# EAGLE board CanSplitter (EAGLE 9.6.2)
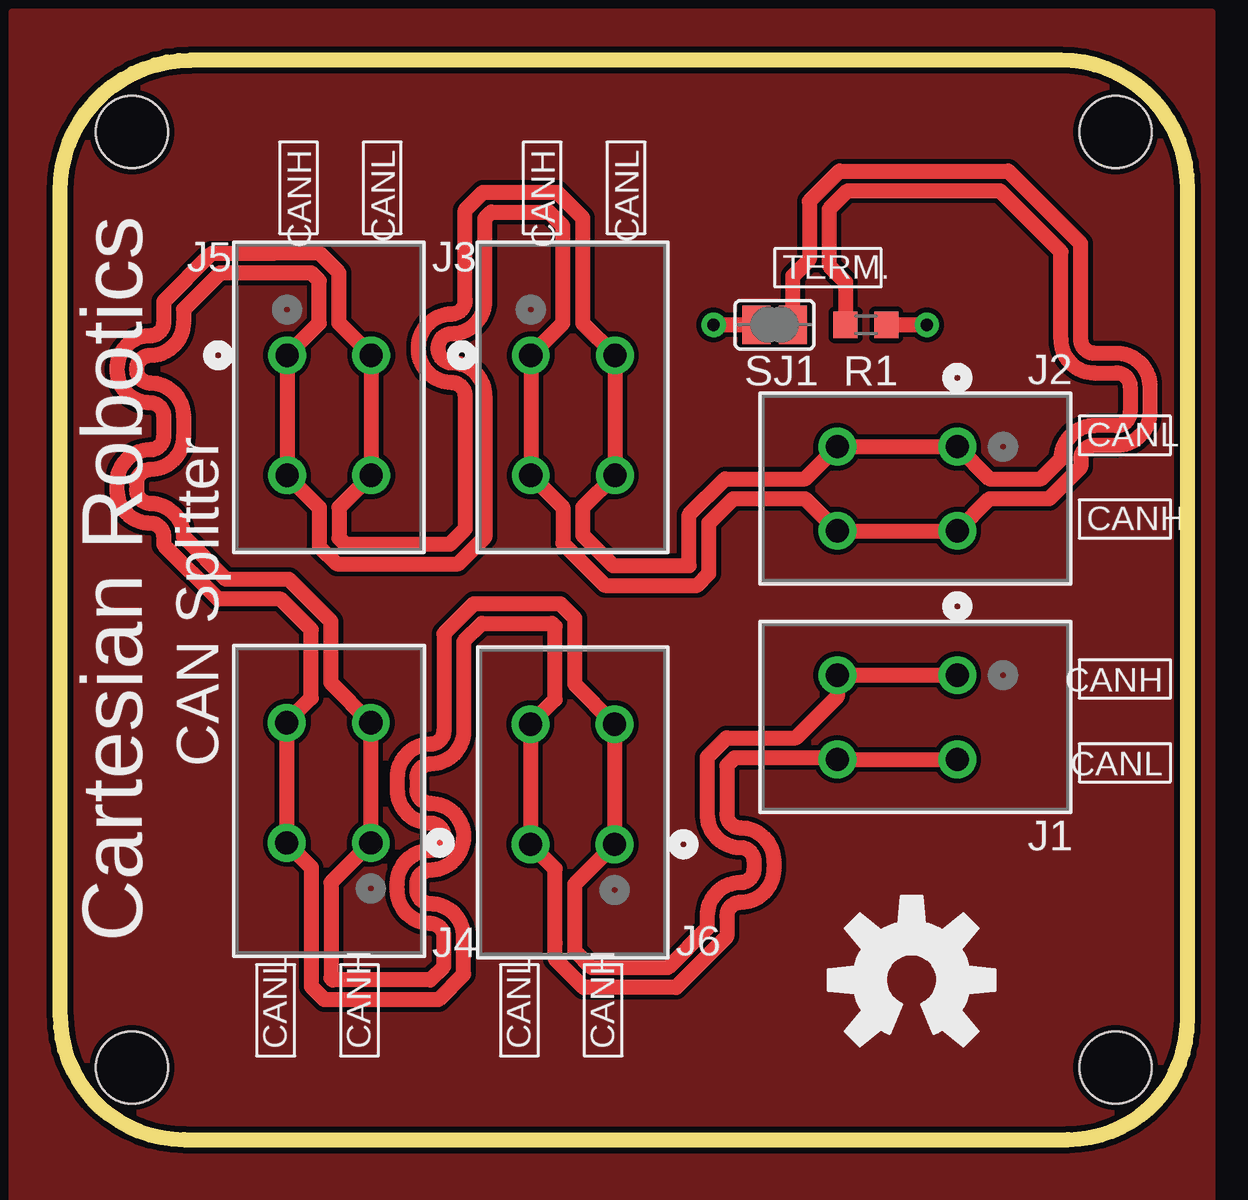
[diagram p0: board, top side]
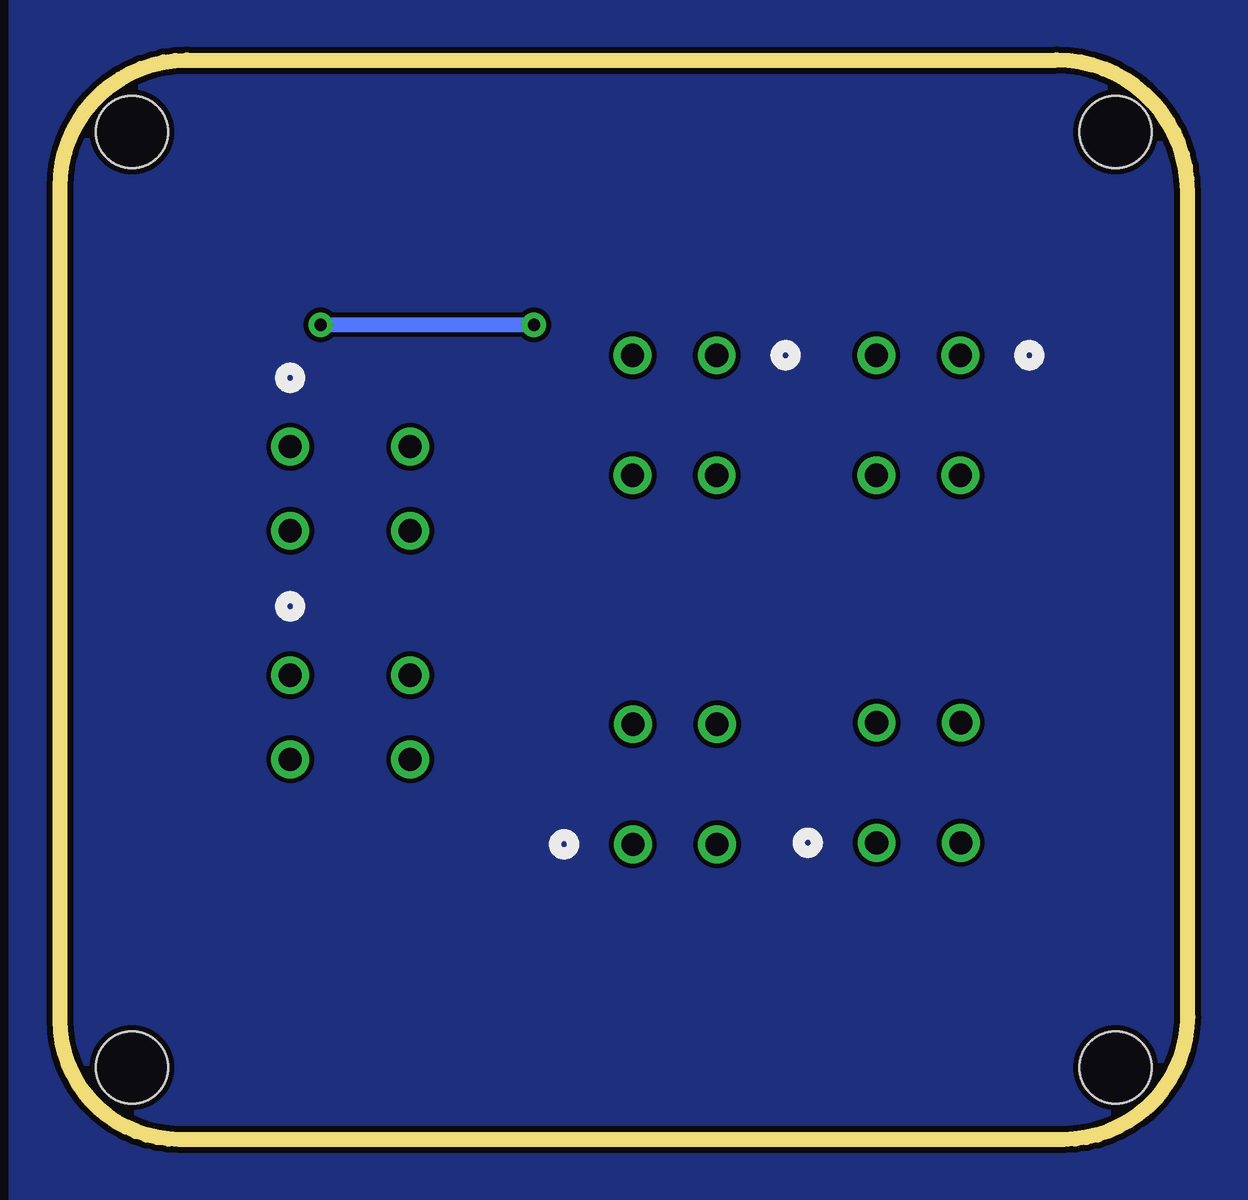
[diagram p1: board, bottom side, seen from below]

Size 47 x 45 mm. Coordinates in mm from the lower left corner, seen from the top.
Outline: 0,5.17 0,39.54 arc-90 5.46,45 41.7,45 arc-90 47,39.7 47,4.97 arc-90 42.03,0 5.17,0 arc-90 0,5.17
Copper layers (1*16): Top 0.035mm / dielectric 1.5mm / Bottom 0.035mm
Design rules "default": minimum track width 8mil, minimum drill 20mil, track to track 8mil, track to pad 8mil, pad to pad 8mil, via to via 8mil, smd to smd 8mil, copper to edge 10mil, drill to drill 8mil, minimum pad ring 12mil, minimum via ring 10mil, stop-mask expansion 4mil, vias tented up to drill 25mil, thermal gap 10mil
Holes 3 mm at 3,42 3,3 44,3 44,42

## Footprints (pad centres in the part's own frame; a part is rotated, then mirrored left to right if it is on the bottom)
CONN4_1885650000_WED = drill 0.965 pad 1.524: 1 0,0; 2 0,-5.004; 3 3.505,0; 4 3.505,-5.004
R0603 = smd 1 x 1.1: 1 -0.85,0; 2 0.85,0
SJ = smd 1.168 x 1.6: 1 -0.762,0; 2 0.762,0

## Placement (x,y rotation side)
J1  1885650000  [CONN4_1885650000_WED]  37.41,19.35 270 top
J2  1885650000  [CONN4_1885650000_WED]  37.41,28.88 270 top
J3  1885650000  [CONN4_1885650000_WED]  19.62,32.69 0 top
J4  1885650000  [CONN4_1885650000_WED]  12.96,12.37 180 top
J5  1885650000  [CONN4_1885650000_WED]  9.47,32.69 0 top
J6  1885650000  [CONN4_1885650000_WED]  23.12,12.31 180 top
LOGO1  OSHW-LOGOL  [OSHW-LOGO-L]  35.5,6.66 0 top
R1  120R  [R0603]  33.59,33.96 0 top
SJ1  [SJ]  29.78,33.96 0 top

## Library data of the parts
J1-J6 = weidmüllerLSF; COPYRIGHT: Copyright (C) 2025 Ultra Librarian. All rights reserved.; MANUFACTURER_PART_NUMBER: 1885650000; MFR_NAME: Weidmuller
LOGO1 = SparkFun-Aesthetics
R1 = rcl; SPICEPREFIX: R
SJ1 = jumper

## Nets
CAN_N: J1.3 J1.4 J2.1 J2.2 J3.3 J3.4 J4.3 J4.4 J5.3 J5.4 J6.3 J6.4 R1.1
CAN_P: J1.1 J1.2 J2.3 J2.4 J3.1 J3.2 J4.1 J4.2 J5.1 J5.2 J6.1 J6.2 SJ1.2
N$1: R1.2 SJ1.1

## Tracks (layer width: path | path; a pad name or v marks a point on that pad's centre or on a via)
CAN_N
  Top 0.62: 20.64,8.19 | 20.64,8.19 20.64,7.53 21.82,6.34 25.68,6.34 27.8,8.46 27.8,9.32 arc-90 28.36,9.89 arc90 29.75,11.27 29.75,11.61 arc90 28.36,12.99 arc-90 27.8,13.56 27.8,15.59 28.13,15.92 32.33,15.92 J1.4 J1.3 | 20.64,8.19 20.64,11.28 J6.3 J6.4 20.64,18.33 20.64,21.39 20.51,21.51 17.59,21.51 16.83,20.75 16.83,17.04 arc-90 15.44,15.66 arc90 14.88,15.09 14.88,14.58 arc90 15.44,14.01 arc-90 16.83,12.62 arc-90 15.44,11.24 arc90 14.88,10.67 14.88,10.39 arc90 15.44,9.83 arc-90 16.83,8.44 16.83,6.89 15.77,5.83 11.03,5.83 10.48,6.38 10.48,11.35 J4.3 J4.4 10.48,18.4 10.48,21.26 9.21,22.53 6.58,22.53 4.32,24.79 4.32,25.13 arc90 3.76,25.7 arc-90 2.37,27.08 2.37,27.36 arc-90 3.76,28.75 arc90 4.32,29.31 4.32,30.15 arc90 3.76,30.71 arc-90 2.37,32.1 2.37,32.12 arc-90 3.76,33.5 arc90 4.32,34.07 4.32,34.94 6.33,36.94 8.93,36.94 | 8.93,36.94 | 8.93,36.94 10.82,36.94 11.63,36.13 11.63,34.03 J5.3 J5.4 11.63,26.34 11.63,25.07 11.88,24.82 16.26,24.82 16.9,25.45 16.9,30.99 arc90 16.33,31.55 arc-90 14.94,32.94 14.94,33.02 arc-90 16.33,34.41 arc90 16.9,34.98 16.9,38.75 17.63,39.48 20.73,39.48 21.79,38.42 21.79,34.03 J3.3 J3.4 21.79,26.34 21.79,25.19 23.05,23.93 26.23,23.93 26.23,26.05 27.72,27.54 31.06,27.54 J2.2 J2.1 38.75,27.54 40.89,27.54 41.72,28.37 arc-90 43.11,29.76 44.04,29.76 arc90 44.61,30.32 44.61,31.39 arc90 44.04,31.96 43.11,31.96 arc-90 41.72,33.34 41.72,37.01 39.18,39.55 32.83,39.55 32.06,38.77 32.06,36.44 32.74,35.75 R1.1
CAN_P
  Top 0.62: 21.46,10.47 21.46,10.65 J6.1 J6.2 21.46,18.97 21.46,21.73 20.85,22.34 17.25,22.34 16.01,21.09 16.01,17.04 arc-90 15.44,16.48 arc90 14.06,15.09 14.06,14.58 arc90 15.44,13.19 arc-90 16.01,12.62 arc-90 15.44,12.06 arc90 14.06,10.67 14.06,10.39 arc90 15.44,9.01 arc-90 16.01,8.44 16.01,7.23 15.43,6.66 11.37,6.66 11.3,6.73 11.3,10.71 J4.1 J4.2 11.3,19.03 11.3,21.6 9.55,23.35 6.92,23.35 5.15,25.13 arc90 3.76,26.52 arc-90 3.2,27.08 3.2,27.36 arc-90 3.76,27.93 arc90 5.15,29.31 5.15,30.15 arc90 3.76,31.54 arc-90 3.2,32.1 3.2,32.12 arc-90 3.76,32.68 arc90 5.15,34.07 5.15,34.59 6.67,36.12 7.43,36.12 | 21.46,10.47 | 21.46,10.47 21.46,7.87 22.16,7.16 25.34,7.16 26.98,8.8 26.98,9.32 arc-90 28.36,10.71 arc90 28.93,11.27 28.93,11.61 arc90 28.36,12.17 arc-90 26.98,13.56 26.98,15.93 27.79,16.74 30.68,16.74 32.4,18.47 J1.2 J1.1 | 7.43,36.12 | SJ1.2 30.55,36 31.23,36.69 31.23,39.11 32.49,40.37 39.52,40.37 42.55,37.35 42.55,33.34 arc90 43.11,32.78 44.04,32.78 arc-90 45.43,31.39 45.43,30.32 arc-90 44.04,28.94 43.11,28.94 arc90 42.55,28.37 42.55,28.03 41.23,26.72 38.75,26.72 J2.3 J2.4 31.06,26.72 28.06,26.72 27.05,25.7 27.05,23.59 26.57,23.1 22.71,23.1 20.97,24.85 20.97,26.34 J3.2 J3.1 20.97,34.03 20.97,38.08 20.39,38.66 17.97,38.66 17.72,38.41 17.72,34.98 arc-90 16.33,33.59 arc90 15.77,33.02 15.77,32.94 arc90 16.33,32.38 arc-90 17.72,30.99 17.72,25.11 16.6,23.99 11.54,23.99 10.81,24.73 10.81,26.34 J5.2 J5.1 10.81,34.03 10.81,35.79 10.48,36.12 7.43,36.12
DONTETCHMYGOODCOPPERAWAY
  pour Bottom: -3,48 -3,-4 49,-4 49,48
GIMMIECOPPER
  pour Top: -2,47 -2,-3 48,-3 48,47
N$1  (via drill 0.51)
  Top 0.62: R1.2 v36.14,33.96 | v27.24,33.96 SJ1.1
  Bottom 0.62: v36.14,33.96 v27.24,33.96

## Text on the board
tPlace: CANH | CANL | CANH | CANL | TERM. | CANL | CANH | CANH | CAN Splitter | CANL | Cartesian Robotics | CANL | CANH | CANL | CANH